# EAGLE board driver (EAGLE 8.1.0)
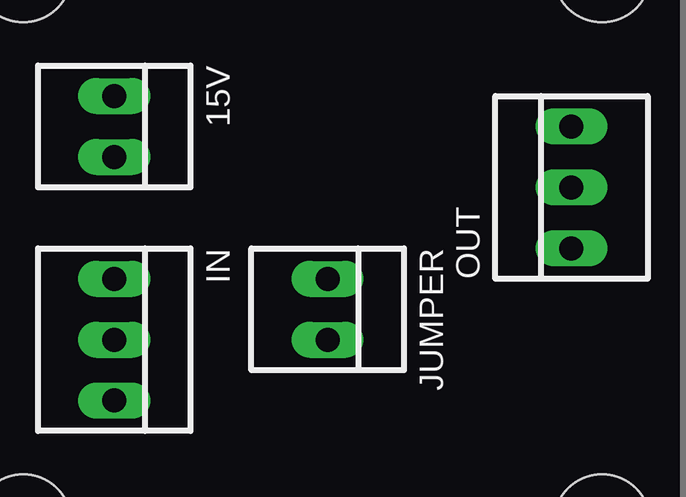
[diagram p0: board, top side]
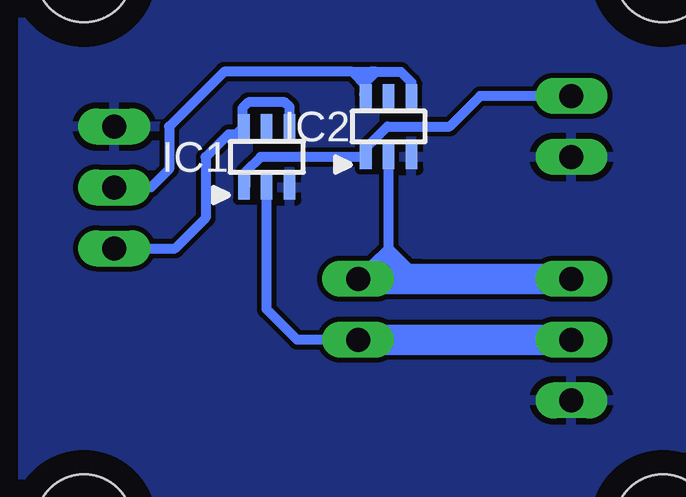
[diagram p1: board, bottom side, seen from below]

No outline drawn. Coordinates in mm, seen from the top.
Copper layers (1*16): Top 0.035mm / dielectric 1.5mm / Bottom 0.035mm
Design rules "default": minimum track width 10mil, minimum drill 24mil, track to track 8mil, track to pad 8mil, pad to pad 8mil, via to via 8mil, smd to smd 8mil, copper to edge 40mil, drill to drill 8mil, minimum pad ring 10mil, minimum via ring 8mil, stop-mask expansion 4mil, vias tented up to drill 0mil, thermal gap 10mil
Holes 4 mm at 3.81,26.67 27.94,26.67 27.94,3.81 3.81,3.81

## Footprints (pad centres in the part's own frame; a part is rotated, then mirrored left to right if it is on the bottom)
22-23-2021 = drill 1 long: 1 -1.27,0; 2 1.27,0
SOT23 = smd 0.483 x 1.016: 1 -0.953,-1.27; 2 0,-1.27; 3 0.953,-1.27; 4 0.953,1.27; 5 0,1.27; 6 -0.953,1.27
22-23-2031 = drill 1 long: 1 -2.54,0; 2 0,0; 3 2.54,0

## Placement (x,y rotation side)
15V  [22-23-2021]  7.62,20.32 270 top
IC1  [SOT23]  20.32,19.05 0 bottom
IC2  [SOT23]  15.24,20.32 0 bottom
IN  22-23-2031  [22-23-2031]  7.62,11.43 270 top
JUMPER  [22-23-2021]  16.51,12.7 270 top
OUT  22-23-2031  [22-23-2031]  26.67,17.78 90 top

## Library data of the parts
15V JUMPER = con-molex; MF: MOLEX; MPN: 22-23-2021; OC_FARNELL: 1462926; OC_NEWARK: 25C3832
IC1 IC2 = felippe
IN OUT = con-molex; MF: MOLEX; MPN: 22-23-2031; OC_FARNELL: 1462950; OC_NEWARK: 30C0862

## Nets
15V+: 15V.1 IC1.1 IC2.1
GND: 15V.2 IC1.3 IC2.3 IN.3 OUT.3
IN1: IC2.2 IN.1 JUMPER.1
IN2: IC1.2 IN.2 JUMPER.2
N$5: IC1.4 IC1.6 OUT.1
N$6: IC2.4 IC2.6 OUT.2

## Tracks (layer width: path | path; a pad name or v marks a point on that pad's centre or on a via)
15V+
  Bottom 0.406: 15V.1 11.43,21.59 12.7,20.32 15.29,20.32 16.19,19.42 IC2.1 20.57,19.05 21.21,18.41 21.21,17.84 IC1.1
GND
  pour Bottom: 1.27,1.27 1.27,29.21 30.48,29.21 30.48,1.27
IN1
  Bottom 0.406: 15.24,15.24 IC2.2 | 15.24,15.24 15.24,13.97 | 15.88,14.61 15.24,15.24 | 15.88,14.61 JUMPER.1 | 13.97,13.97 14.61,14.61 | 14.61,14.61 15.24,15.24 | 14.61,14.61 15.88,14.61
  Bottom 1.27: IN.1 13.97,13.97 15.24,13.97 JUMPER.1
IN2
  Bottom 0.406: JUMPER.2 19.05,11.43 20.32,12.7 IC1.2
  Bottom 1.27: IN.2 JUMPER.2
N$5
  Bottom 0.406: IC1.4 19.37,21.14 19.56,21.34 21.08,21.34 21.34,21.08 21.34,20.38 IC1.6 21.59,20 21.91,20 22.86,19.05 22.86,16.51 24.13,15.24 OUT.1
N$6
  Bottom 0.406: IC2.4 14.29,22.16 14.73,22.61 15.75,22.61 | 15.75,22.61 16,22.61 | 16,22.61 16.26,22.35 16.26,21.65 IC2.6 | 16.76,22.61 16,22.61 | 16.76,22.61 22.1,22.61 24.38,20.32 24.38,18.54 25.15,17.78 OUT.2 | IC2.6 16.19,22.04 16.76,22.61 | IC2.6 16.19,22.16 15.75,22.61